# Altium PCB MB1367.PcbDoc (part 2 of 6)
Units mm, origin at the board's own origin, x right, y up, seen from the top; angles counter-clockwise.
Board outline 70 x 82.5 mm, 4 copper layers (Top Layer, Signal Layer 1, Signal Layer 2, Bottom Layer), stack 1.614 mm thick; 187 components, 143 nets, 802 pads, 920 vias.
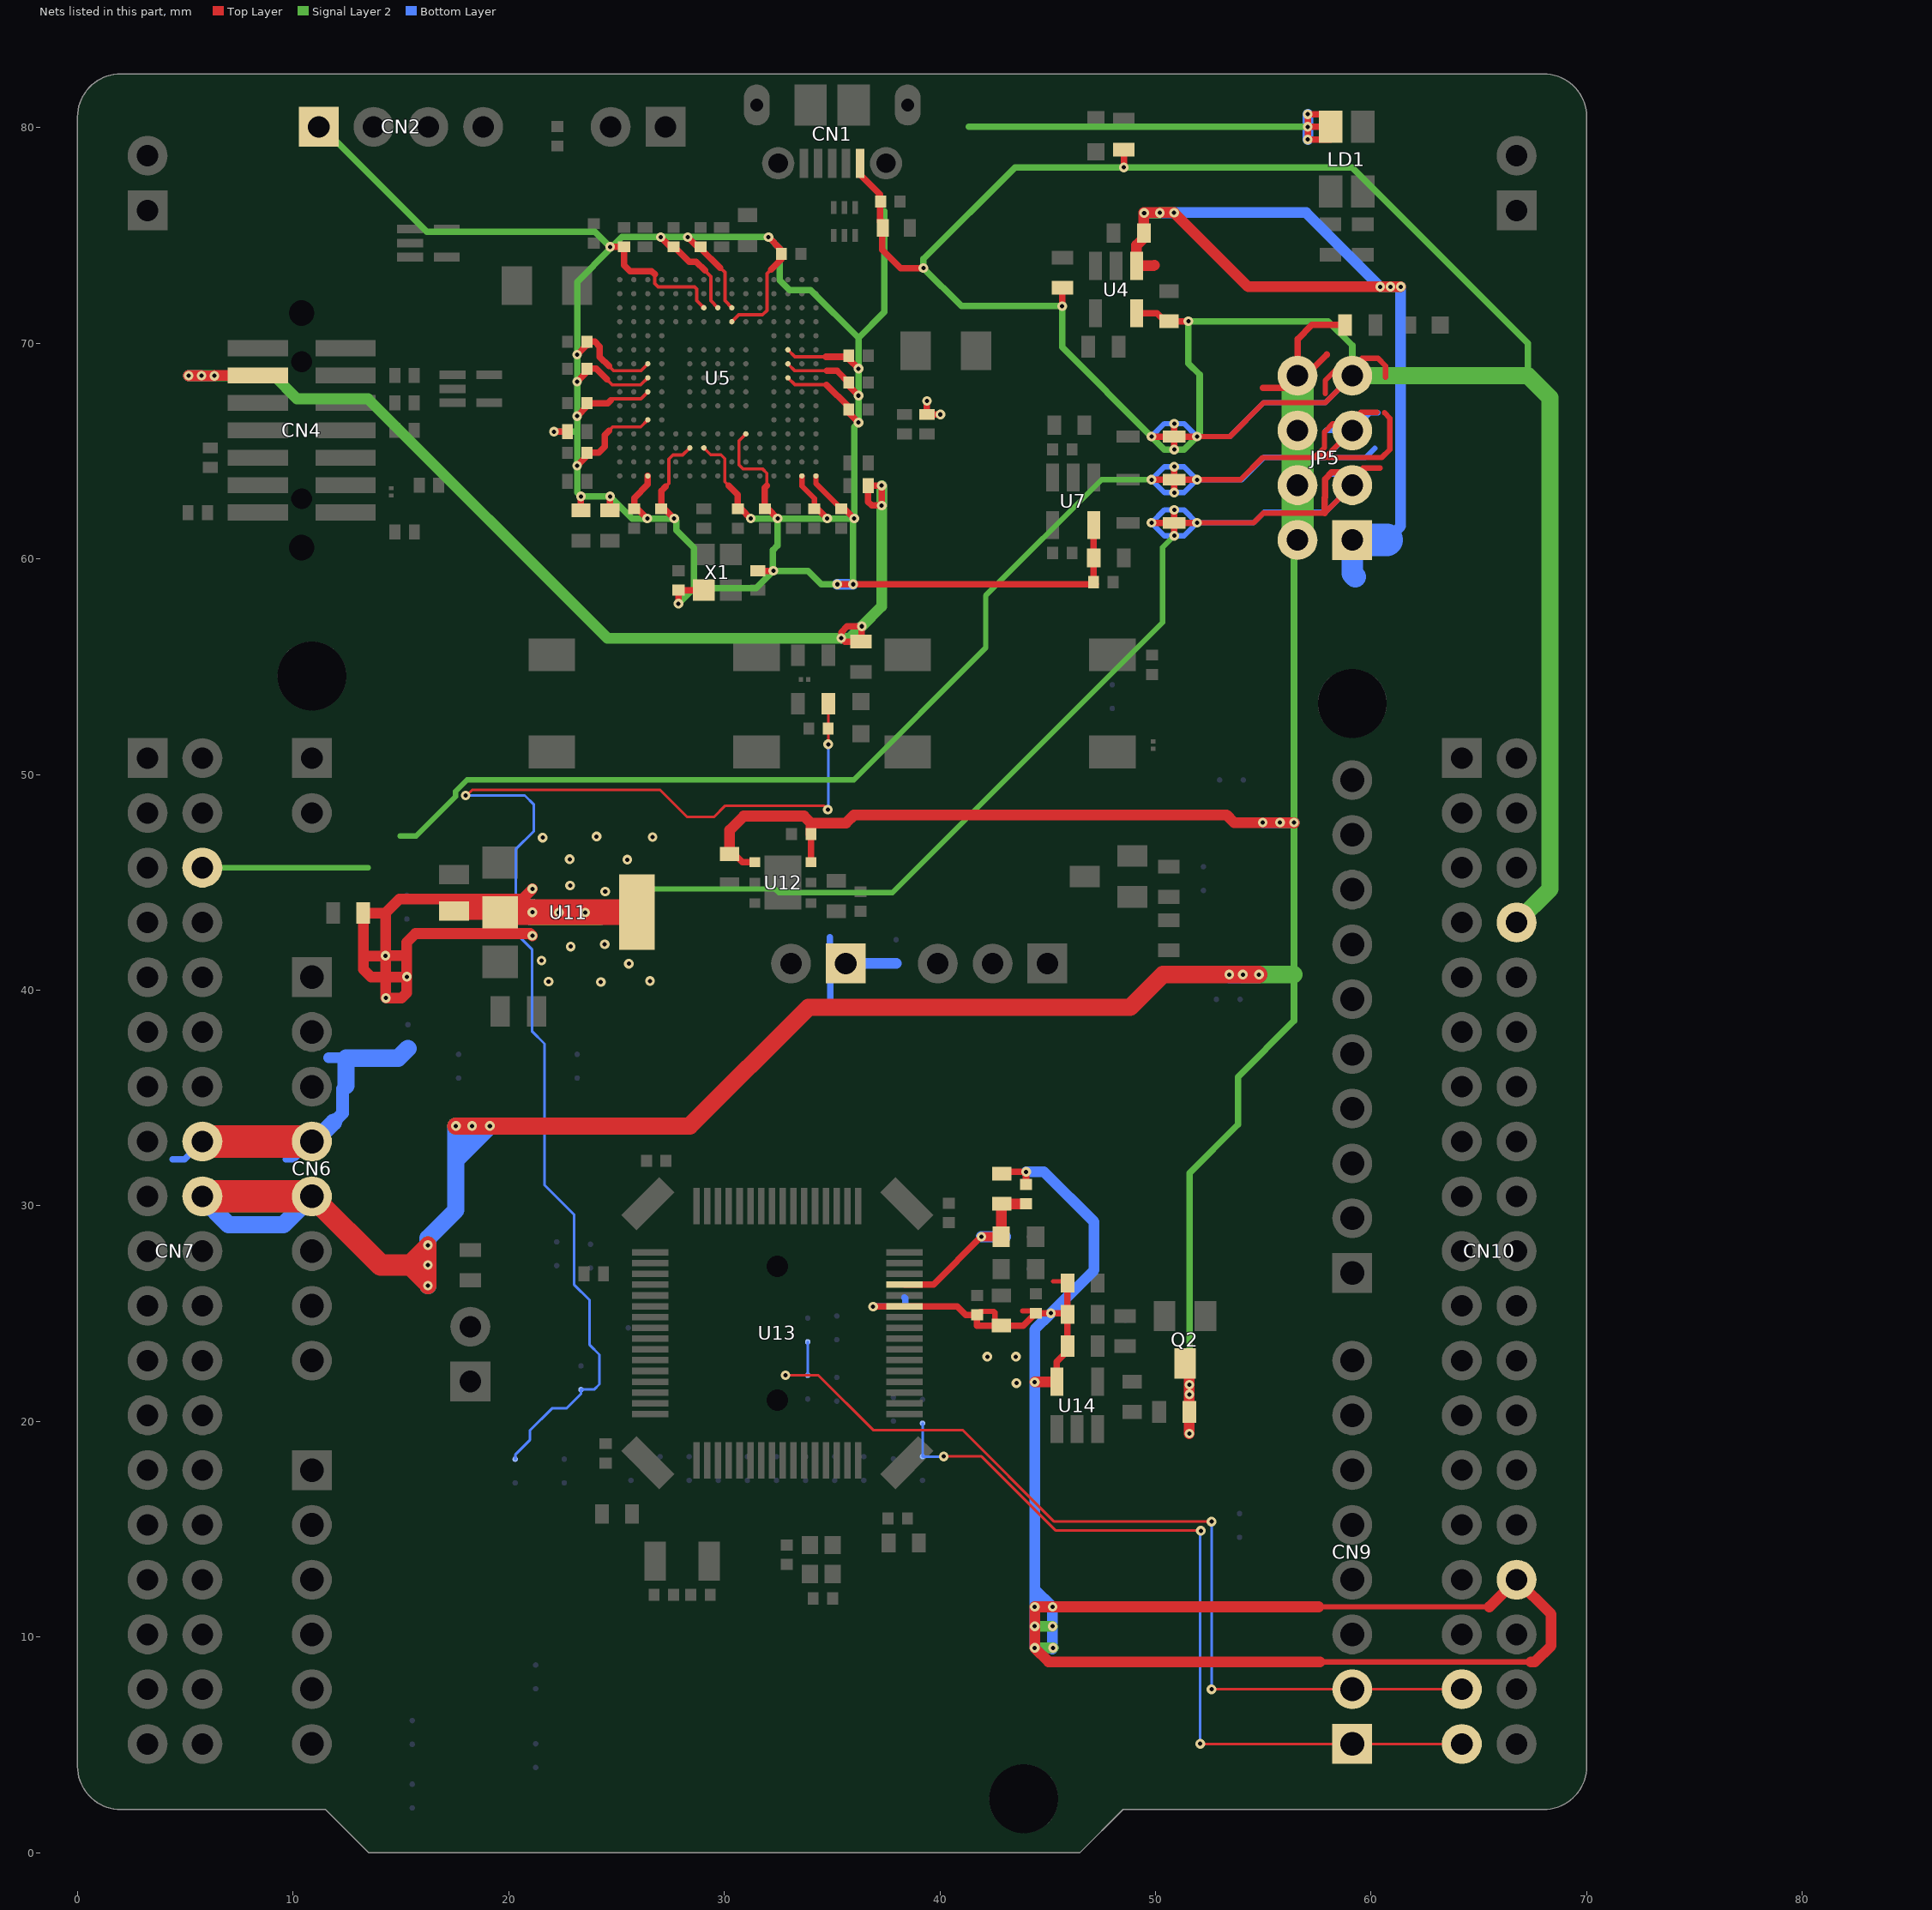
[diagram p4: the nets of this part, all layers, seen from the top]

## Part data
B1: library part MCD-00002, "Non-Open Push-Button 0.1A 24V", Manufacturer=WEALTHMETAL, Manufacturer_HQ_COO=Unknown, Manufacturer_Part_Number=TD-0341X-GO0, Package=6x10mm, Alternate_EMS=A, Component_Country_Of_Origin=Unknown, ComponentLink1Description=Datasheet, ComponentLink1URL=http://tunmcdsvn.tun.st.com/Component_Documentation_Library/Trunk/Misc/WEALTHMETAL_TD-0341, ECCN_EU=n/a, ECCN_US=n/a, ID=2464, Internal_Part_Number=MCD-00002, Order_Code_Digikey=N/A, Order_Code_Farnell=N/A, Order_Code_RS=N/A, Part_Preference=Forbidden, Part_Type=Misc, Partial_Alternate_Internal_Part_Number=MCD-03589, Provided_By=SUBCO, ShowFields=YES, Status=Obsolete
B2: library part MCD-00001, "Non-Open Push-Button 0.1A 24V BLACK", Manufacturer=WEALTHMETAL, Manufacturer_Part_Number=TD-0341X-A00, Package=6x10mm, Alternate_EMS=A, Component_Country_Of_Origin=Unknown, ComponentLink1Description=Datasheet, ComponentLink1URL=http://tunmcdsvn.tun.st.com/Component_Documentation_Library/Trunk/Misc/WEALTHMETAL_TD-0341, ECCN_EU=n/a, ECCN_US=n/a, ID=2463, Internal_Part_Number=MCD-00001, Order_Code_Digikey=N/A, Order_Code_Farnell=N/A, Order_Code_RS=N/A, Part_Preference=Forbidden, Part_Type=Misc, Partial_Alternate_Internal_Part_Number=MCD-03587, Provided_By=SUBCO, ShowFields=YES, Status=Obsolete
C1 C6 C7 C8 C9 C13 C14 C15 C16 C17 C18 C20 C21 C22 C23 C24 C25 C26 C27 C32 C33 C34 C35 C36 C40 C42 C44 C45 C47 C49 C52 C54: library part MCD-00006, "Capacitor, MLCC, 100nF, 16V, X7R, +/-10%, 0402, T=0.5mm", Manufacturer=YAGEO, Manufacturer_Part_Number=CC0402KRX7R7BB104, Package=0402, Component_Country_Of_Origin=China, ComponentLink1URL=http://tunmcdsvn.tun.st.com/Component_Documentation_Library/Trunk/Capacitor/YAGEO_X7R_Series, ID=2474, Internal_Part_Number=MCD-00006, Order_Code_Digikey=311-1338-1-ND, Order_Code_Farnell=9402047, Order_Code_RS=9402047, Part_Preference=Recommended, Part_Type=Capacitor, Partial_Alternate_Internal_Part_Number=MCD-03299, ShowFields=YES, Status=Released
C2: library part MCD-00205, "Capacitor, MLCC, 100pF, 50V, NPO, 5%, 0402, T=0,5mm", Manufacturer=YAGEO, Manufacturer_Part_Number=CC0402JRNPO9BN101, Package=0402, Component_Country_Of_Origin=China, ComponentLink1Description=Yageo_Capacitor_NP0_16V-to-50V.pdf, ComponentLink1URL=http://tunmcdsvn.tun.st.com/Component_Documentation_Library/Trunk/Capacitor/YAGEO_NP0_Series, ID=2658, Internal_Part_Number=MCD-00205, Order_Code_Digikey=311-1024-1-ND, Order_Code_Farnell=3019226RL, Order_Code_RS=N/A, Part_Preference=Recommended, Part_Type=Capacitor, Provided_By=Subcon, ShowFields=YES, Status=Released
C3: library part MCD-00016, "Capacitor, MLCC, 20pF, 50V, NPO, 5%, 0402, T=0,5mm", Manufacturer=YAGEO, Manufacturer_Part_Number=CC0402JRNPO9BN200, Package=0402, Component_Country_Of_Origin=China, ComponentLink1Description=Yageo_Capacitor_NP0_16V-to-50V.pdf, ComponentLink1URL=http://tunmcdsvn.tun.st.com/Component_Documentation_Library/Trunk/Capacitor/YAGEO_NP0_Series, ECCN_EU=n/a, ECCN_US=n/a, ID=2479, Initial_Board_Reference=MB1274, Internal_Part_Number=MCD-00016, Order_Code_Digikey=311-1417-1-ND, Order_Code_Farnell=N/A, Order_Code_RS=N/A, Part_Preference=Recommended, Part_Type=Capacitor, Provided_By=Subcon, ShowFields=YES, Status=Released
C4: library part MCD-00012, "Capacitor, MLCC, 2.2uF, 10V, X5R, 10%, 0603, T=0,8mm", Alternate_Manufacturer=KEMET, Alternate_Manufacturer_Part_Number=C0603C225K8PACTU, Manufacturer=YAGEO, Manufacturer_Part_Number=CC0603KRX5R6BB225, Package=0603, BMS_Part_Number=9142010, Component_Country_Of_Origin=China, ComponentLink1Description=Yageo_Capacitor_X5R-series.pdf, ComponentLink1URL=http://tunmcdsvn.tun.st.com/Component_Documentation_Library/Trunk/Capacitor/YAGEO_X5R_Series, ECCN_EU=n/a, ECCN_US=n/a, ID=2467, Initial_Board_Reference=MB1274, Internal_Part_Number=MCD-00012, Order_Code_Digikey=311-1451-1-ND, Order_Code_Farnell=2370679, Order_Code_RS=2370679, Part_Preference=Recommended, Part_Type=Capacitor, Partial_Alternate_Internal_Part_Number=MCD-00551, Provided_By=Subcon, ShowFields=YES, Status=Released
C5 C11 C19 C29 C31 C37 C39 C43 C48 C53: library part MCD-00010, "Capacitor, MLCC, 1uF, 16V, X5R, 10%, 0603, T=0,8mm", Manufacturer=YAGEO, Manufacturer_Part_Number=CC0603KRX5R7BB105, Package=0603, Component_Country_Of_Origin=China, ComponentLink1Description=Yageo_Capacitor_X5R-series.pdf, ComponentLink1URL=http://tunmcdsvn.tun.st.com/Component_Documentation_Library/Trunk/Capacitor/YAGEO_X5R_Series, ECCN_EU=n/a, ECCN_US=n/a, ID=2470, Initial_Board_Reference=MB1274, Internal_Part_Number=MCD-00010, Order_Code_Digikey=311-1444-1-ND, Order_Code_Farnell=2370680, Order_Code_RS=2370680, Part_Preference=Recommended, Part_Type=Capacitor, Provided_By=Subcon, ShowFields=YES, Status=Released
C10 C12: library part MCD-00008, "Capacitor, MLCC, 2.2uF, 16V, X7R, 10%, 1206, T=1,15mm", Alternate_Manufacturer=KEMET, Alternate_Manufacturer_Part_Number=C1206C225K4RAC, Manufacturer=YAGEO, Manufacturer_Part_Number=CC1206KKX7R7BB225, Package=1206, Component_Country_Of_Origin=China, ComponentLink1Description=Yageo_Capacitor_X7R-series.pdf, ComponentLink1URL=http://tunmcdsvn.tun.st.com/Component_Documentation_Library/Trunk/Capacitor/YAGEO_X7R_Series, ECCN_EU=n/a, ECCN_US=n/a, ID=2472, Initial_Board_Reference=MB1274, Internal_Part_Number=MCD-00008, Order_Code_Digikey=311-1957-1-ND, Order_Code_Farnell=N/A, Order_Code_RS=N/A, Part_Preference=Recommended, Part_Type=Capacitor, Provided_By=Subcon, ShowFields=YES, Status=Released
C28 C55: library part MCD-00009, "Capacitor, MLCC, 4.7uF, 16V, X5R, 10%, 0603, T=0.8mm", Manufacturer=YAGEO, Manufacturer_Part_Number=CC0603KRX5R7BB475, Package=0603, Alternate_EMS=A, Component_Country_Of_Origin=China, ComponentLink1Description=Yageo_Capacitor_X5R-series.pdf, ComponentLink1URL=http://tunmcdsvn.tun.st.com/Component_Documentation_Library/Trunk/Capacitor/YAGEO_X5R_Series, ECCN_EU=n/a, ECCN_US=n/a, ID=2471, Initial_Board_Reference=MB1274, Internal_Part_Number=MCD-00009, Order_Code_Digikey=311-1785-1-ND, Order_Code_Farnell=N/A, Order_Code_RS=N/A, Part_Preference=Recommended, Part_Type=Capacitor, Partial_Alternate_Internal_Part_Number=MCD-03565, Provided_By=subcon, ShowFields=YES, Status=Released
C30: library part MCD-00011, "Capacitor, MLCC, 10nF, 16V, X7R, 10%, 0402, T=0.5mm", Manufacturer=YAGEO, Manufacturer_Part_Number=CC0402KRX7R7BB103, Package=0402, Component_Country_Of_Origin=China, ComponentLink1Description=Yageo_Capacitor_X7R-series.pdf, ComponentLink1URL=http://tunmcdsvn.tun.st.com/Component_Documentation_Library/Trunk/Capacitor/YAGEO_X7R_Series, ECCN_EU=n/a, ECCN_US=n/a, ID=2469, Initial_Board_Reference=MB1274, Internal_Part_Number=MCD-00011, Order_Code_Digikey=311-1042-1-ND, Order_Code_Farnell=3019275, Order_Code_RS=3019275, Part_Preference=Recommended, Part_Type=Capacitor, Provided_By=Subcon, ShowFields=YES, Status=Released
C38 C41: library part MCD-00014, "Capacitor, MLCC, 10uF, 25V, X5R, 10%, 0805, T=0,85mm", Manufacturer=YAGEO, Manufacturer_Part_Number=CC0805KRX5R8BB106, Package=0805, Component_Country_Of_Origin=China, ComponentLink1Description=Datasheet, ComponentLink1URL=http://tunmcdsvn.tun.st.com/Component_Documentation_Library/Trunk/Capacitor/YAGEO_X5R_Series, ECCN_EU=NEC, ECCN_US=EAR99, Full_Alternate_Internal_Part_Number=MCD-02385, ID=2468, Internal_Part_Number=MCD-00014, Order_Code_Digikey=311-3503-1-ND, Order_Code_Farnell=N/A, Order_Code_RS=N/A, Part_Preference=Recommended, Part_Type=Capacitor, Partial_Alternate_Internal_Part_Number=MCD-03053, Provided_By=SUBCO, ShowFields=YES, Status=Released
C46: library part MCD-01124, "Capacitor, MLCC, 10uF, 10V, X5R, 10%, 0603, T=0.8mm", Manufacturer=MURATA, Manufacturer_Part_Number=GRM188R61A106KAAL, Package=0603, Component_Country_Of_Origin=Japan°°, ComponentLink1Description=Datasheet, ComponentLink1URL=http://tunmcdsvn.tun.st.com/Component_Documentation_Library/Trunk/Capacitor/MURATA_GRM_Series, ECCN_EU=NEC, ECCN_US=EAR99, ID=3372, Internal_Part_Number=MCD-01124, Order_Code_Digikey=490-12733-1-ND, Order_Code_Farnell=N/A, Order_Code_RS=170-6258, Part_Preference=Recommended, Part_Type=Capacitor, Partial_Alternate_Internal_Part_Number=MCD-03152, Provided_By=SUBCO, ShowFields=YES, Status=Released
C50: library part MCD-00211, "Capacitor, MLCC, 100nF, 16V, X7R, 10%, 0603, T=0,8mm", Manufacturer=YAGEO, Manufacturer_Part_Number=CC0603KRX7R7BB104, Package=0603, Component_Country_Of_Origin=China, ComponentLink1Description=Datasheet, ComponentLink1URL=http://tunmcdsvn.tun.st.com/Component_Documentation_Library/Trunk/Capacitor/YAGEO_X7R_Series, ECCN_EU=NEC, ECCN_US=EAR99, ID=2659, Internal_Part_Number=MCD-00211, Order_Code_Digikey=311-1088-1-ND, Order_Code_Farnell=432210, Order_Code_RS=669-8763, Part_Preference=Recommended, Part_Type=Capacitor, Partial_Alternate_Internal_Part_Number=MCD-01099, Provided_By=SUBCO, ShowFields=YES, Status=Released
C51: library part MCD-01101, "Capacitor,100pF,50V,X7R,10%,0603", Alternate_Manufacturer=N/A, Manufacturer="KYOCERA AVX", Manufacturer_Part_Number=06035C101JAT4A, Package=0603, Alternate_Manufacturer_Part_Number=N/A, Component_Country_Of_Origin=China, ComponentLink1Description=Datasheet, ComponentLink1URL=http://tunmcdsvn.tun.st.com/Component_Documentation_Library/Trunk/Capacitor/AVX_X7R_Series, ECCN_EU=NEC, ECCN_US=EAR99, ID=3399, Internal_Part_Number=MCD-01101, Order_Code_Digikey=06035C101JAT4A-ND, Order_Code_Farnell=2332634, Order_Code_RS=N/A, Part_Preference=Recommended, Part_Type=Capacitor, Provided_By=SUBCO, ShowFields=YES, Status=Checked
C56 C59: library part MCD-00674, "Capacitor, MLCC, 6.8pF, 50V, NPO, +-0.25pF, 0402, T=0.5mm", Manufacturer=YAGEO, Manufacturer_Part_Number=CC0402CRNPO9BN6R8, Package=0402, Component_Country_Of_Origin=China, ComponentLink1Description=Datasheet, ComponentLink1URL=http://tunmcdsvn.tun.st.com/Component_Documentation_Library/Trunk/Capacitor/YAGEO_NP0_Series, ECCN_EU=N/A, ECCN_US=N/A, ID=3068, Internal_Part_Number=MCD-00674, Order_Code_Digikey=311-3327-1-ND, Order_Code_Farnell=N/A, Order_Code_RS=N/A, Part_Preference=Recommended, Part_Type=Capacitor, Provided_By=SUBCO, ShowFields=YES, Status=Released
C57 C58: library part MCD-00003, "Capacitor, MLCC, 5.1pF, 50V, NPO, +-0.25pF, 0402, T=0.5mm", Manufacturer=YAGEO, Manufacturer_Part_Number=CC0402CRNPO9BN5R1, Package=0402, Component_Country_Of_Origin=China, ComponentLink1Description=Datasheet, ComponentLink1URL=http://tunmcdsvn.tun.st.com/Component_Documentation_Library/Trunk/Capacitor/YAGEO_NP0_Series, ECCN_EU=NEC, ECCN_US=EAR99, ID=2477, Internal_Part_Number=MCD-00003, Order_Code_Digikey=311-1633-1-ND, Order_Code_Farnell=N/A, Order_Code_RS=N/A, Part_Preference=Recommended, Part_Type=Capacitor, Provided_By=SUBCO, ShowFields=YES, Status=Released
CN1: library part MCD-00028, "USB-MICRO-B, 0.65mm, RA, SMT, Bottom Mount,", Manufacturer=MOLEX, Manufacturer_Part_Number=1050170001, Component_Country_Of_Origin=Unknown, ComponentLink1Description=Molex_Connector-USB-microB_105017-0001.pdf, ComponentLink1URL=http://tunmcdsvn.tun.st.com/Component_Documentation_Library/Trunk/Connector/MOLEX_1050170001, ECCN_EU=n/a, ECCN_US=n/a, ID=2489, Initial_Board_Reference=MB1274, Internal_Part_Number=MCD-00028, Order_Code_Digikey=WM1399TR-ND, Order_Code_Farnell=2293836, Order_Code_RS=2293836, Part_Preference=Recommended, Part_Type=Connector, Partial_Alternate_Internal_Part_Number=MCD-04277, Provided_By=Subcon, ShowFields=YES, Status=Released
CN2: library part MCD-00029, "Header, 4x1, 2,54mm, VR, TH, Height 5.84mm/2.54mm", Manufacturer=SAMTEC, Manufacturer_Part_Number=TSW-104-07-G-S, Component_Country_Of_Origin="United States°", ComponentLink1Description=Samtec_connector_TSW-HTSW-series.pdf, ComponentLink1URL=http://tunmcdsvn.tun.st.com/Component_Documentation_Library/Trunk/Connector/SAMTEC_TSW_Series, ECCN_EU=n/a, ECCN_US=n/a, ID=2487, Initial_Board_Reference=MB1274, Internal_Part_Number=MCD-00029, Order_Code_Digikey=TSW-104-07-G-S-ND, Order_Code_Farnell=2667450, Order_Code_RS=161-2460, Part_Preference=Recommended, Part_Type=Connector, Partial_Alternate_Internal_Part_Number=MCD-04227, Provided_By=Subcon, ShowFields=YES, Status=Released
CN4: library part MCD-01226, "Header 5x2, 1.27mm, Dual row, Straight, Surface mount, vertical male connector. 3.05mm lead. Mates with FFSD connector. Footprint compatible with FTSH-107-01-L-DV,-K,-A,-P,-ES (STDC14 MEDIUM)", Alternate_Manufacturer=JIUBABA, Alternate_Manufacturer_Part_Number=P127B-2x05MGF-079-0A, Manufacturer=SAMTEC, Manufacturer_Part_Number=FTSH-105-01-L-DV-K, Component_Country_Of_Origin="China, Costa Rica, Malaysia, USA, Vietnam", ComponentLink1Description=Datasheet, ComponentLink1URL=http://tunmcdsvn.tun.st.com/Component_Documentation_Library/Trunk/Connector/SAMTEC_FTSH_Series, ECCN_EU=n/a, ECCN_US=n/a, ID=3265, Internal_Part_Number=MCD-01226, Order_Code_Digikey=SAM8799-ND, Order_Code_Farnell=2856879, Order_Code_RS=159-2332, Part_Preference=Recommended, Part_Type=Connector, Partial_Alternate_Internal_Part_Number="MCD-02956, MCD-03742, MCD-03788, MCD-03996, MCD-04591", Provided_By=SUBCO, ShowFields=YES, Status=Released
CN5: library part MCD-00262, "Socket, 10x1, 2.54mm, VR, TH, Height 8.51mm/10mm", Manufacturer=SAMTEC, Manufacturer_Part_Number=SSW-110-03-G-S, Component_Country_Of_Origin="China, Costa Rica, Malaysia, USA, Vietnam", ComponentLink1Description=Datasheet, ComponentLink1URL=http://tunmcdsvn.tun.st.com/Component_Documentation_Library/Trunk/Connector/SAMTEC_SSW-SSQ(TH)_Series/, ECCN_EU=n/a, ECCN_US=n/a, Full_Alternate_Internal_Part_Number=MCD-02397, ID=2609, Internal_Part_Number=MCD-00262, Order_Code_Digikey=SSW-110-03-G-S-ND, Order_Code_Farnell=3661270, Order_Code_RS=207-9189, Part_Preference=Recommended, Part_Type=Connector, Provided_By=SUBCO, ShowFields=YES, Status=Released
CN6 CN9: library part MCD-00261, "Socket, 8x1, 2.54mm, VR, TH, Height 8.51mm/10mm", Manufacturer=SAMTEC, Manufacturer_Part_Number=SSW-108-03-G-S, Component_Country_Of_Origin="China, Costa Rica, Malaysia, USA, Vietnam", ComponentLink1Description=Datasheet, ComponentLink1URL=http://tunmcdsvn.tun.st.com/Component_Documentation_Library/Trunk/Connector/SAMTEC_SSW-SSQ(TH)_Series/, ECCN_EU=n/a, ECCN_US=n/a, ID=2607, Internal_Part_Number=MCD-00261, Order_Code_Digikey=SSW-108-03-G-S-ND, Order_Code_Farnell=N/A, Order_Code_RS=N/A, Part_Preference=Recommended, Part_Type=Connector, Partial_Alternate_Internal_Part_Number=MCD-02396, Provided_By=SUBCO, ShowFields=YES, Status=Released
CN7 CN10: library part MCD-00213, "Header, 19x2, 2,54mm, VR, TH, Height 5.84mm/10.16mm", Manufacturer=SAMTEC, Manufacturer_Part_Number=TSW-119-09-G-D, Component_Country_Of_Origin="China, Costa Rica, Malaysia, USA, Vietnam", ComponentLink1Description=Datasheet, ComponentLink1URL=http://tunmcdsvn.tun.st.com/Component_Documentation_Library/Trunk/Connector/SAMTEC_TSW_Series, ECCN_EU=n/a, ECCN_US=n/a, ID=2656, Internal_Part_Number=MCD-00213, Order_Code_Digikey=TSW-119-09-G-D-ND, Order_Code_Farnell=3664236, Order_Code_RS=N/A, Part_Preference=Recommended, Part_Type=Connector, Partial_Alternate_Internal_Part_Number="MCD-00213, MCD-02394, MCD-03736, MCD-03787, MCD-03997, MCD-04171, MCD-04274", Provided_By=SUBCO, ShowFields=YES, Status=Released
CN8: library part MCD-00260, "Socket, 6x1, 2.54mm, VR, TH, Height 8.51mm/10mm", Manufacturer=SAMTEC, Manufacturer_Part_Number=SSW-106-03-G-S, Component_Country_Of_Origin="China, Costa Rica, Malaysia, USA, Vietnam", ComponentLink1Description=Datasheet, ComponentLink1URL=http://tunmcdsvn.tun.st.com/Component_Documentation_Library/Trunk/Connector/SAMTEC_SSW-SSQ(TH)_Series/, ECCN_EU=n/a, ECCN_US=n/a, ID=2606, Internal_Part_Number=MCD-00260, Order_Code_Digikey=SSW-106-03-G-S-ND, Order_Code_Farnell=N/A, Order_Code_RS=N/A, Part_Preference=Recommended, Part_Type=Connector, Partial_Alternate_Internal_Part_Number=MCD-02395, Provided_By=SUBCO, ShowFields=YES, Status=Released
CN11 CN12: library part MCD-00214, "Header, 2x1, 2,54mm, VR, TH, Height 5.84mm/10.16mm", Manufacturer=SAMTEC, Manufacturer_Part_Number=TSW-102-09-G-S, Component_Country_Of_Origin="China, Costa Rica, Malaysia, USA, Vietnam", ComponentLink1Description=Samtec_connector_TSW-HTSW-series.pdf, ComponentLink1URL=http://tunmcdsvn.tun.st.com/Component_Documentation_Library/Trunk/Connector/SAMTEC_TSW_Series/, ECCN_EU=n/a, ECCN_US=n/a, ID=2652, Initial_Board_Reference=MB1319, Internal_Part_Number=MCD-00214, Order_Code_Digikey=SAM10845-ND, Order_Code_Farnell=3663349, Order_Code_RS=180-3129, Part_Preference=Recommended, Part_Type=Connector, Partial_Alternate_Internal_Part_Number="MCD-02393, MCD-03591, MCD-03719, MCD-03986, MCD-03999, MCD-04227", Provided_By=Subcon, ShowFields=YES, Status=Released
D1 D2 D3: library part MCD-00034, "BAT60JFILM", Manufacturer=STMICROELECTRONICS, Manufacturer_HQ_COO=EU, Package=SOD-323, BMS_Part_Number=9151097, Component_Country_Of_Origin=China, ComponentLink1Description=STM_Diode_BAT60JFILM-SOD323.pdf, ComponentLink1URL=http://tunmcdsvn.tun.st.com/Component_Documentation_Library/Trunk/Diode/STMICROELECTRONICS_BAT60J_Series, ECCN_EU=NEC, ECCN_US=EAR99, ID=2483, Initial_Board_Reference=MB1274, Internal_Part_Number=MCD-00034, Manufacturer_Part_Number=BAT60JFILM, Order_Code_Digikey=497-3707-2-ND, Order_Code_Farnell=1467544, Order_Code_RS=714-6879, Part_Preference=Recommended, Part_Type=Diode, Provided_By=Subcon, ShowFields=YES, Status=Released
HW103: library part MCD-00636, "NUCLEO logo footprint for PCB", Manufacturer=N/A, Manufacturer_HQ_COO=Unknown, Component_Country_Of_Origin=Unknown, ComponentLink1Description=Datasheet, ECCN_EU=n/a, ECCN_US=n/a, ID=3110, Internal_Part_Number=MCD-00636, Manufacturer_Part_Number=N/A, Order_Code_Digikey=N/A, Order_Code_Farnell=N/A, Order_Code_RS=N/A, Part_Preference=Forbidden, Part_Type=Accessory, Provided_By=n/a, ShowFields=YES, Status=Obsolete
HW104: library part MCD-00626, "CE logo footprint for PCB", Manufacturer=N/A, Manufacturer_HQ_COO=Unknown, Component_Country_Of_Origin=Unknown, ComponentLink1Description=Datasheet, ComponentLink1URL=http://tunmcdsvn.tun.st.com/Component_Documentation_Library/Trunk, ECCN_EU=n/a, ECCN_US=n/a, ID=3116, Internal_Part_Number=MCD-00626, Manufacturer_Part_Number=N/A, Order_Code_Digikey=N/A, Order_Code_Farnell=N/A, Order_Code_RS=N/A, Part_Preference=Forbidden, Part_Type=Misc, Provided_By=n/a, ShowFields=YES, Status=Obsolete
HW105: library part MCD-00628, "ROHS logo footprint for PCB", Manufacturer=N/A, Manufacturer_HQ_COO=Unknown, Component_Country_Of_Origin=Unknown, ComponentLink1Description=Datasheet, ComponentLink1URL=http://tunmcdsvn.tun.st.com/Component_Documentation_Library/Trunk, ECCN_EU=n/a, ECCN_US=n/a, ID=3120, Internal_Part_Number=MCD-00628, Manufacturer_Part_Number=N/A, Order_Code_Digikey=N/A, Order_Code_Farnell=N/A, Order_Code_RS=N/A, Part_Preference=Forbidden, Part_Type=Misc, Provided_By=n/a, ShowFields=YES, Status=Obsolete
HW106: library part MCD-00625, "STMicroelectronics logo footprint for PCB", Manufacturer=N/A, Manufacturer_HQ_COO=Unknown, Component_Country_Of_Origin=Unknown, ComponentLink1Description=Datasheet, ComponentLink1URL=http://tunmcdsvn.tun.st.com/Component_Documentation_Library/Trunk/Misc, ECCN_EU=n/a, ECCN_US=n/a, ID=3117, Internal_Part_Number=MCD-00625, Manufacturer_Part_Number=N/A, Order_Code_Digikey=N/A, Order_Code_Farnell=N/A, Order_Code_RS=N/A, Part_Preference=Forbidden, Part_Type=Misc, Provided_By=n/a, ShowFields=YES, Status=Obsolete
HW107: library part MCD-00627, "Hand ESD logo footprint for PCB", Manufacturer=N/A, Manufacturer_HQ_COO=Unknown, Component_Country_Of_Origin=Unknown, ComponentLink1Description=Datasheet, ComponentLink1URL=http://tunmcdsvn.tun.st.com/Component_Documentation_Library/Trunk/Misc, ECCN_EU=n/a, ECCN_US=n/a, ID=3114, Internal_Part_Number=MCD-00627, Manufacturer_Part_Number=N/A, Order_Code_Digikey=N/A, Order_Code_Farnell=N/A, Order_Code_RS=N/A, Part_Preference=Forbidden, Part_Type=Misc, Provided_By=n/a, ShowFields=YES, Status=Obsolete
JP1 JP7: library part MCD-00045, "Header, 2x1, 2,54mm, VR, TH, Height 5.84mm/2.54mm", Manufacturer=SAMTEC, Manufacturer_Part_Number=TSW-102-07-G-S, Component_Country_Of_Origin="China, Costa Rica, Malaysia, USA, Vietnam", ComponentLink1Description=Samtec_connector_TSW-HTSW-series.pdf, ComponentLink1URL=http://tunmcdsvn.tun.st.com/Component_Documentation_Library/Trunk/Connector/SAMTEC_TSW_Series, ECCN_EU=n/a, ECCN_US=n/a, ID=2545, Initial_Board_Reference=MB1274, Internal_Part_Number=MCD-00045, Order_Code_Digikey=SAM1029-02-ND, Order_Code_Farnell=2505044, Order_Code_RS=2505044, Part_Preference=Recommended, Part_Type=Connector, Partial_Alternate_Internal_Part_Number="MCD-02389, MCD-02957, MCD-03720, MCD-03979, MCD-04249", Provided_By=Subcon, ShowFields=YES, Status=Released
JP3 JP6: library part MCD-00683, "Header, 2x1, 2,54mm, VR, TH, Height 5.84mm/2.54mm - Shunt Fitted by default", Manufacturer=SAMTEC, Manufacturer_Part_Number=TSW-102-07-G-S, Component_Country_Of_Origin="China, Costa Rica, Malaysia, USA, Vietnam", ComponentLink1Description=Samtec_connector_TSW-HTSW-series.pdf, ComponentLink1URL=http://tunmcdsvn.tun.st.com/Component_Documentation_Library/Trunk/Connector/SAMTEC_TSW_Series, ECCN_EU=n/a, ECCN_US=n/a, ID=3057, Initial_Board_Reference=MB1331, Internal_Part_Number=MCD-00683, Order_Code_Digikey=SAM1029-02-ND, Order_Code_Farnell=2505044, Order_Code_RS=155-5312, Part_Preference=Recommended, Part_Type=Connector, Partial_Alternate_Internal_Part_Number="MCD-02389, MCD-02957, MCD-03720, MCD-03979, MCD-04463", Provided_By=Subcon, ShowFields=YES, Status=Released
JP5: library part MCD-00686, "Header, 4x2, 2,54mm, VR, TH, Height 5.84mm/2.54mm - Shunt Fitted 1-2", Manufacturer=SAMTEC, Manufacturer_Part_Number=TSW-104-07-G-D, Component_Country_Of_Origin="China, Costa Rica, Malaysia, USA, Vietnam", ComponentLink1Description=Datasheet, ComponentLink1URL=http://tunmcdsvn.tun.st.com/Component_Documentation_Library/Trunk/Connector/SAMTEC_TSW_Series, ECCN_EU=n/a, ECCN_US=n/a, ID=3062, Internal_Part_Number=MCD-00686, Order_Code_Digikey=SAM1028-04-ND, Order_Code_Farnell=2856692, Order_Code_RS=161-2260, Part_Preference=Recommended, Part_Type=Connector, Partial_Alternate_Internal_Part_Number="MCD-01661, MCD-03721, MCD-03993", Provided_By=SUBCO, ShowFields=YES, Status=Released
JP8: library part MCD-00684, "Header, 3x1, 2,54mm, VR, TH, Height 5.84mm/2.54mm - Shunt Fitted 1-2 by default", Manufacturer=SAMTEC, Manufacturer_Part_Number=TSW-103-07-F-S, Component_Country_Of_Origin="China, Costa Rica, Malaysia, USA, Vietnam", ComponentLink1Description=Datasheet, ComponentLink1URL=http://tunmcdsvn.tun.st.com/Component_Documentation_Library/Trunk/Connector/SAMTEC_TSW_Series/, ECCN_EU=n/a, ECCN_US=n/a, ID=3059, Internal_Part_Number=MCD-00684, Order_Code_Digikey=SAM8995-ND, Order_Code_Farnell=2505043, Order_Code_RS=161-2248, Part_Preference=Recommended, Part_Type=Connector, Partial_Alternate_Internal_Part_Number="MCD-03595, MCD-03723, MCD-03849, MCD-03980, MCD-04583", Provided_By=SUBCO, ShowFields=YES, Status=Released
L1 L2: library part MCD-00047, "SMD Chip ferrite bead, 600R@100MHz +/-25%, 350mA, 500mohm DC, 0603, T=0.8mm", Manufacturer=TAI-TECH, Manufacturer_Part_Number=FCM1608KF-601T03, Package=0603, Component_Country_Of_Origin=Unknown, ComponentLink1Description=Datasheet, ComponentLink1URL=http://tunmcdsvn.tun.st.com/Component_Documentation_Library/Trunk/Inductor/TAI-TECH_FCM-1608_Series, ECCN_EU=n/a, ECCN_US=n/a, ID=2546, Internal_Part_Number=MCD-00047, Order_Code_Digikey=N/A, Order_Code_Farnell=N/A, Order_Code_RS=N/A, Part_Preference=Recommended, Part_Type=Inductor, Partial_Alternate_Internal_Part_Number=MCD-02959, Provided_By=SUBCO, ShowFields=YES, Status=Released
LD1: library part MCD-02402, "LED Bicolor", Manufacturer=EVERLIGHT, Manufacturer_Part_Number=67-22SURSYGC/S530-A2/TR8, Package=4-PLCC, Alternate_Internal_Part_Number=MCD-00051, ComponentLink1URL=http://tunmcdsvn.tun.st.com/Component_Documentation_Library/Trunk/Display/EVERLIGHT_67-22sursygc-s530-a2-tr8, Full_Alternate_Internal_Part_Number="MCD-00051, MCD-02631", ID=4508, Internal_Part_Number=MCD-02402, Order_Code_Digikey=1080-67-22SURSYGC/S530-A2/TR8TR-ND, Order_Code_Farnell=N/A, Order_Code_RS=N/A, Part_Preference="Not recommended", Part_Type=Display, ShowFields=YES, Status=Released
LD2 LD3: library part MCD-02900, "LED, Green, 2V, 20mA, 0603", Manufacturer=EVERLIGHT, Manufacturer_Part_Number=19-213SYGC/S530-E2/5T, Package=0603, Component_Country_Of_Origin=China, ComponentLink1URL=http://tunmcdsvn.tun.st.com/Component_Documentation_Library/Trunk/Display/EVERLIGHT_19-213SYGC-S530-E2-5T, Full_Alternate_Internal_Part_Number=MCD-00320, ID=5016, Internal_Part_Number=MCD-02900, Order_Code_Digikey=1080-19-213SYGC/S530-E2/5TTR-ND, Order_Code_Farnell=N/A, Order_Code_RS=N/A, Part_Preference=Recommended, Part_Type=Display, Partial_Alternate_Internal_Part_Number=MCD-00050, ShowFields=YES, Status=Released
LD4: library part MCD-02787, "LED, Red, 1V7 to 2V2, 5mA, 0603", Manufacturer=EVERLIGHT, Manufacturer_Part_Number=19-217/R6C-AL1M2VY/6T, Package=0603, Component_Country_Of_Origin=China, ComponentLink1URL=http://tunmcdsvn.tun.st.com/Component_Documentation_Library/Trunk/Display/EVERLIGHT_19-217-R6C-AL1M2VY-6T, Full_Alternate_Internal_Part_Number=MCD-02401, ID=4899, Internal_Part_Number=MCD-02787, Order_Code_Digikey=1080-19-217/R6C-AL1M2VY/6TTR-ND, Order_Code_Farnell=N/A, Order_Code_RS=N/A, Part_Preference=Recommended, Part_Type=Display, Partial_Alternate_Internal_Part_Number=MCD-00586, ShowFields=YES, Status=Released
Q1 Q2: library part MCD-00073, "NPN Bipolar Transistor", Alternate_Manufacturer="ON SEMICONDUCTOR", Alternate_Manufacturer_Part_Number="MMBT2222LT1G / MMBT2222ALT1G / MMBT2222ALT3G", Manufacturer_Part_Number=BSR14, Package=SOT-23, Component_Country_Of_Origin=Unknown, ComponentLink1Description=Datasheet, ComponentLink1URL=http://tunmcdsvn.tun.st.com/Component_Documentation_Library/Trunk/IC/ON_SEMICONDUCTOR_BSR14, ECCN_EU=NEC, ECCN_US=EAR99, ID=2519, Internal_Part_Number=MCD-00073, Manufacturer="ON SEMICONDUCTOR", Order_Code_Digikey=N/A, Order_Code_Farnell=N/A, Order_Code_RS=N/A, Part_Preference=Recommended, Part_Type=Transistor, Partial_Alternate_Internal_Part_Number="MCD-01737, MCD-03305, MCD-02988", Provided_By=SUBCO, ShowFields=YES, Status=Released
R1 R30: library part MCD-00070, "Resistor,1K,0603,1%,1/10W", Manufacturer=YAGEO, Manufacturer_Part_Number=RC0603FR-071KL, Package=0603, Component_Country_Of_Origin=China, ComponentLink1Description=Yageo_Resistor_RC0603-series.pdf, ComponentLink1URL=http://tunmcdsvn.tun.st.com/Component_Documentation_Library/Trunk/Resistor/YAGEO_RC_L_Series, ECCN_EU=n/a, ECCN_US=n/a, ID=2522, Initial_Board_Reference=MB1274, Internal_Part_Number=MCD-00070, Order_Code_Digikey=311-1.00KHRCT-ND, Order_Code_Farnell=9238484RL, Order_Code_RS=9238484RL, Part_Preference=Recommended, Part_Type=Resistor, Provided_By=Subcon, ShowFields=YES, Status=Released
R2 R3: library part MCD-00490, "Resistor, 560R, 0603, +/-1%, 1/10W", Manufacturer=YAGEO, Manufacturer_Part_Number=RC0603FR-07560RL, Package=0603, BMS_Part_Number=9129742, Component_Country_Of_Origin=China, ComponentLink1URL=http://tunmcdsvn.tun.st.com/Component_Documentation_Library/Trunk/Resistor/YAGEO_RC_L_Series, ID=2787, Internal_Part_Number=MCD-00490, Order_Code_Digikey=311-560HRCT-ND, Order_Code_Farnell=9238450, Order_Code_RS=N/A, Part_Preference=Recommended, Part_Type=Resistor, ShowFields=YES, Status=Released
R4 R15 R20: library part MCD-00067, "Resistor, 100R, 0402, +/- 1%, 1/16W", Manufacturer=YAGEO, Manufacturer_Part_Number=RC0402FR-07100RL, Package=0402, Component_Country_Of_Origin=China, ComponentLink1URL=http://tunmcdsvn.tun.st.com/Component_Documentation_Library/Trunk/Resistor/YAGEO_RC_L_Series, ID=2527, Internal_Part_Number=MCD-00067, Order_Code_Digikey=311-100LRCT-ND, Order_Code_Farnell=9239111, Order_Code_RS=9239111, Part_Preference=Recommended, Part_Type=Resistor, ShowFields=YES, Status=Released
R5: library part MCD-00185, "Resistor,3K,0402,1%,1/16W", Manufacturer=YAGEO, Manufacturer_Part_Number=RC0402FR-073KL, Package=0402, Component_Country_Of_Origin=China, ComponentLink1Description=Yageo_Resistor_RC0402-series.pdf, ComponentLink1URL=http://tunmcdsvn.tun.st.com/Component_Documentation_Library/Trunk/Resistor/YAGEO_RC_L_Series, ECCN_EU=n/a, ECCN_US=n/a, ID=2682, Internal_Part_Number=MCD-00185, Order_Code_Digikey=311-3KLRCT-ND, Order_Code_Farnell=1458777, Order_Code_RS=N/A, Part_Preference=Recommended, Part_Type=Resistor, Provided_By=Subcon, ShowFields=YES, Status=Released
R6 R26 R28: library part MCD-00223, "Resistor,100K,0603,1%,1/10W", Manufacturer=YAGEO, Manufacturer_Part_Number=RC0603FR-07100KL, Package=0603, Component_Country_Of_Origin=China, ComponentLink1Description=Yageo_Resistor_RC0603-series.pdf, ComponentLink1URL=http://tunmcdsvn.tun.st.com/Component_Documentation_Library/Trunk/Resistor/YAGEO_RC_L_Series, ECCN_EU=n/a, ECCN_US=n/a, ID=2647, Initial_Board_Reference=MB1319, Internal_Part_Number=MCD-00223, Order_Code_Digikey=311-100KHRTR-ND, Order_Code_Farnell=2421851, Order_Code_RS=N/A, Part_Preference=Recommended, Part_Type=Resistor, Provided_By=Subcon, ShowFields=YES, Status=Released
R7 R25: library part MCD-00225, "Resistor,510R,0603,1%,1/10W", Manufacturer=YAGEO, Manufacturer_Part_Number=RC0603FR-07510RL, Package=0603, Component_Country_Of_Origin=China, ComponentLink1Description=Datasheet, ComponentLink1URL=http://tunmcdsvn.tun.st.com/Component_Documentation_Library/Trunk/Resistor/YAGEO_RC_L_Series, ECCN_EU=NEC, ECCN_US=EAR99, ID=2644, Internal_Part_Number=MCD-00225, Order_Code_Digikey=311-510HRCT-ND, Order_Code_Farnell=1799351, Order_Code_RS=N/A, Part_Preference=Recommended, Part_Type=Resistor, Provided_By=SUBCO, ShowFields=YES, Status=Released
R8 R31: library part MCD-00220, "Resistor,10K,0603,1%,1/10W", Manufacturer=YAGEO, Manufacturer_Part_Number=RC0603FR-0710KL, Package=0603, Component_Country_Of_Origin=China, ComponentLink1Description=Yageo_Resistor_RC0603-series.pdf, ComponentLink1URL=http://tunmcdsvn.tun.st.com/Component_Documentation_Library/Trunk/Resistor/YAGEO_RC_L_Series, ECCN_EU=n/a, ECCN_US=n/a, ID=2649, Initial_Board_Reference=MB1319, Internal_Part_Number=MCD-00220, Order_Code_Digikey=311-10.0KHRCT-ND, Order_Code_Farnell=9238603, Order_Code_RS=N/A, Part_Preference=Recommended, Part_Type=Resistor, Provided_By=Subcon, ShowFields=YES, Status=Released
R9 R10 R13 R18 R22 R23 R32: library part MCD-00481, "Resistor,47R,0402,1%,1/16W", Manufacturer=YAGEO, Manufacturer_Part_Number=RC0402FR-0747RL, Package=0402, Component_Country_Of_Origin=China, ComponentLink1Description=Datasheet, ComponentLink1URL=http://tunmcdsvn.tun.st.com/Component_Documentation_Library/Trunk/Resistor/YAGEO_RC_L_Series, ECCN_EU=NEC, ECCN_US=EAR99, ID=2796, Internal_Part_Number=MCD-00481, Order_Code_Digikey=311-47.0LRCT-ND, Order_Code_Farnell=9239073, Order_Code_RS=N/A, Part_Preference=Recommended, Part_Type=Resistor, Provided_By=SUBCO, ShowFields=YES, Status=Released
R11 R16 R19: library part MCD-00065, "Resistor,4K7,0402,1%,1/16W", Alternate_Manufacturer=YAGEO, Alternate_Manufacturer_Part_Number=RT0402FRE074K7L, Manufacturer_Part_Number=RC0402FR-074K7L, Package=0402, Component_Country_Of_Origin=China, ComponentLink1Description=Yageo_Resistor_RC0402-series.pdf, ComponentLink1URL=http://tunmcdsvn.tun.st.com/Component_Documentation_Library/Trunk/Resistor/YAGEO_RC_L_Series, ECCN_EU=n/a, ECCN_US=n/a, ID=2526, Initial_Board_Reference=MB1274, Internal_Part_Number=MCD-00065, Manufacturer=YAGEO, Order_Code_Digikey=311-4.7KLRCT-ND, Order_Code_Farnell=9239316, Order_Code_RS=9239316, Part_Preference=Recommended, Part_Type=Resistor, Partial_Alternate_Internal_Part_Number=MCD-03300, Provided_By=Subcon, ShowFields=YES, Status=Released
R12: library part MCD-00055, "Resistor,2K7,0402,1%,1/16W", Manufacturer=YAGEO, Manufacturer_Part_Number=RC0402FR-072K7L, Package=0402, Component_Country_Of_Origin=China, ComponentLink1Description=Yageo_Resistor_RC0402-series.pdf, ComponentLink1URL=http://tunmcdsvn.tun.st.com/Component_Documentation_Library/Trunk/Resistor/YAGEO_RC_L_Series, ECCN_EU=n/a, ECCN_US=n/a, ID=2535, Initial_Board_Reference=MB1274, Internal_Part_Number=MCD-00055, Order_Code_Digikey=311-2.70KLRCT-ND, Order_Code_Farnell=9239286, Order_Code_RS=9239286, Part_Preference=Recommended, Part_Type=Resistor, Provided_By=Subcon, ShowFields=YES, Status=Released
R14 R17 R21 R24: library part MCD-00053, "Resistor,10K,0402,1%,1/16W", Manufacturer=YAGEO, Manufacturer_Part_Number=RC0402FR-0710KL, Package=0402, BMS_Part_Number=9131590, Component_Country_Of_Origin=China, ComponentLink1Description=Yageo_Resistor_RC0402-series.pdf, ComponentLink1URL=http://tunmcdsvn.tun.st.com/Component_Documentation_Library/Trunk/Resistor/YAGEO_RC_L_Series, ECCN_EU=n/a, ECCN_US=n/a, ID=2539, Initial_Board_Reference=MB1274, Internal_Part_Number=MCD-00053, Order_Code_Digikey=311-10.0KLRCT-ND, Order_Code_Farnell=9239359, Order_Code_RS=9239359, Part_Preference=Recommended, Part_Type=Resistor, Provided_By=subcon, ShowFields=YES, Status=Released
R27: library part MCD-00197, "Resistor,330R,0603,1%,1/10W", Manufacturer=YAGEO, Manufacturer_Part_Number=RC0603FR-07330RL, Package=0603, BMS_Part_Number=9129729, Component_Country_Of_Origin=China, ComponentLink1Description=Yageo_Resistor_RC0603-series.pdf, ComponentLink1URL=http://tunmcdsvn.tun.st.com/Component_Documentation_Library/Trunk/Resistor/YAGEO_RC_L_Series, ECCN_EU=n/a, ECCN_US=n/a, ID=2672, Internal_Part_Number=MCD-00197, Order_Code_Digikey=311-330HRCT-ND, Order_Code_Farnell=9238425, Order_Code_RS=N/A, Part_Preference=Recommended, Part_Type=Resistor, Provided_By=Subcon, ShowFields=YES, Status=Released
R29: library part MCD-00222, "Resistor,47K,0603,1%,1/10W", Manufacturer=YAGEO, Manufacturer_Part_Number=RC0603FR-0747KL, Package=0603, Component_Country_Of_Origin=China, ComponentLink1Description=Datasheet, ComponentLink1URL=http://tunmcdsvn.tun.st.com/Component_Documentation_Library/Trunk/Resistor/YAGEO_RC_L_Series, ECCN_EU=NEC, ECCN_US=EAR99, ID=2645, Internal_Part_Number=MCD-00222, Order_Code_Digikey=311-47.0KHRCT-ND, Order_Code_Farnell=9238689, Order_Code_RS=N/A, Part_Preference=Recommended, Part_Type=Resistor, Provided_By=SUBCO, ShowFields=YES, Status=Released
R33: library part MCD-01215, "resistor, 10K, 0603, 0.5%, 1/10W", Manufacturer=YAGEO, Manufacturer_Part_Number=RC0603DR-0710KL, Package=0603, Component_Country_Of_Origin=China, ComponentLink1Description=Datasheet, ComponentLink1URL=http://tunmcdsvn.tun.st.com/Component_Documentation_Library/Trunk/Resistor/YAGEO_RC_L_Series, ECCN_EU=NEC, ECCN_US=EAR99, ID=3280, Internal_Part_Number=MCD-01215, Order_Code_Digikey=RC0603DR-0710KL-ND, Order_Code_Farnell=N/A, Order_Code_RS=N/A, Part_Preference=Recommended, Part_Type=Resistor, Provided_By=SUBCO, ShowFields=YES, Status=Checked
R34: library part MCD-01209, "Resistor,33K,0603,0.5%,1/10W", Manufacturer=YAGEO, Manufacturer_Part_Number=RC0603DR-0733KL, Package=0603, Component_Country_Of_Origin=China, ComponentLink1Description=Datasheet, ComponentLink1URL=http://tunmcdsvn.tun.st.com/Component_Documentation_Library/Trunk/Resistor/YAGEO_RC_L_Series, ECCN_EU=NEC, ECCN_US=EAR99, ID=3286, Internal_Part_Number=MCD-01209, Order_Code_Digikey=RC0603DR-0733KL-ND, Order_Code_Farnell=N/A, Order_Code_RS=N/A, Part_Preference=Recommended, Part_Type=Resistor, Provided_By=SUBCO, ShowFields=YES, Status=Checked
R35: library part MCD-00342, "Resistor,180R,0603,1%,1/10W", Manufacturer=YAGEO, Manufacturer_Part_Number=RC0603FR-07180RL, Package=0603, Component_Country_Of_Origin=China, ComponentLink1Description=Datasheet, ComponentLink1URL=http://tunmcdsvn.tun.st.com/Component_Documentation_Library/Trunk/Resistor/YAGEO_RC_L_Series, ECCN_EU=NEC, ECCN_US=EAR99, ID=2936, Internal_Part_Number=MCD-00342, Order_Code_Digikey=311-180HRCT-ND, Order_Code_Farnell=9238395, Order_Code_RS=N/A, Part_Preference=Recommended, Part_Type=Resistor, Provided_By=SUBCO, ShowFields=YES, Status=Released
SB1 SB2 SB3 SB4 SB5 SB6 SB7 SB8 SB9 SB10 SB11 SB12 SB13 SB14 SB15 SB16 SB17 SB18 SB19 SB20 SB21 SB22 SB23 SB24 SB25 SB26 SB27 SB28 SB29 SB30 SB31 SB32 SB33 SB34 SB35 SB36 SB37 SB38 SB39 SB40 SB41: library part MCD-00071, "Solder Bridge ON", Manufacturer=YAGEO, Manufacturer_HQ_COO=Unknown, Manufacturer_Part_Number=RC0603JR-070RL, Package=0603, Component_Country_Of_Origin=China, ComponentLink1Description=Datasheet, ComponentLink1URL=http://tunmcdsvn.tun.st.com/Component_Documentation_Library/Trunk/Resistor/YAGEO_RC_Series, ECCN_EU=n/a, ECCN_US=n/a, ID=2521, Internal_Part_Number=MCD-00071, Order_Code_Digikey=311-0.0GRTR-ND, Order_Code_Farnell=2421846, Order_Code_RS=199-5647, Part_Preference=Recommended, Part_Type=Resistor, Provided_By=SUBCO, ShowFields=YES, Status=Released
U1 U6: library part MCD-00136, "Dual Transil array for ESD protection", Manufacturer=STMICROELECTRONICS, Manufacturer_HQ_COO=EU, Manufacturer_Part_Number=ESDALC6V1W5, Package=SOT323-5, BMS_Part_Number=9151112, Component_Country_Of_Origin=China, ComponentLink1Description=STM_ESD_ESDALC6V1W5.pdf, ComponentLink1URL=http://tunmcdsvn.tun.st.com/Component_Documentation_Library/Trunk/Diode/STMICROELECTRONICS_ESDALC6V1W5, ECCN_EU=NEC, ECCN_US=EAR99, ID=2731, Initial_Board_Reference=MB1262, Internal_Part_Number=MCD-00136, Order_Code_Digikey=497-7231-2-ND, Order_Code_Farnell=2252381, Order_Code_RS=178-7373, Part_Preference=Recommended, Part_Type=Diode, Provided_By=Subcon, ShowFields=YES, Status=Released
U2: library part MCD-00649, "Common mode filter with ESD protection for USB 2.0 interface", Manufacturer=STMICROELECTRONICS, Manufacturer_HQ_COO=EU, Manufacturer_Part_Number=ECMF02-2AMX6, Package=QFN-6, BMS_Part_Number=9151138, Component_Country_Of_Origin=China, ComponentLink1Description=STM_ESD_ECMF02-2AMX6.pdf, ComponentLink1URL=http://tunmcdsvn.tun.st.com/Component_Documentation_Library/Trunk/Diode/STMICROELECTRONICS_ECMF02-2AMX6, ECCN_EU=NEC, ECCN_US=EAR99, ID=3094, Initial_Board_Reference=MB1248, Internal_Part_Number=MCD-00649, Order_Code_Digikey=497-10773-2-ND, Order_Code_Farnell=2629720, Order_Code_RS=880-5276, Part_Preference=Recommended, Part_Type=Diode, Provided_By=Subcon, ShowFields=YES, Status=Released
U3: library part MCD-00251, "High power transient voltage suppressor, 7V breakdown", Manufacturer=STMICROELECTRONICS, Manufacturer_HQ_COO=EU, Manufacturer_Part_Number=ESDA7P60-1U1M, Package=QFN1610, BMS_Part_Number=9179042, Component_Country_Of_Origin=China, ComponentLink1Description=STM_ESD_ESDA7P60-1U1M.pdf, ComponentLink1URL=http://tunmcdsvn.tun.st.com/Component_Documentation_Library/Trunk/Diode/STMICROELECTRONICS_ESDA7P60-1U1M, ECCN_EU=NEC, ECCN_US=EAR99, ID=2618, Initial_Board_Reference=MB1311, Internal_Part_Number=MCD-00251, Order_Code_Digikey=497-16253-2-ND, Order_Code_Farnell=N/A, Order_Code_RS=110-6381, Part_Preference=Recommended, Part_Type=Diode, Provided_By=Subcon, ShowFields=YES, Status=Released
U4: library part MCD-00159, "500mA, Enhanced single channel power switches with active high enable pin", Alternate_Manufacturer="TEXAS INSTRUMENTS", Alternate_Manufacturer_Part_Number=TPS2051C, Manufacturer=STMICROELECTRONICS, Manufacturer_Part_Number=STMPS2151STR, Package=SOT23-5, BMS_Part_Number=9159009, Component_Country_Of_Origin=Malaysia, ComponentLink1Description=STM_PWR-Switch_STMPS2151STR.pdf, ComponentLink1URL=http://tunmcdsvn.tun.st.com/Component_Documentation_Library/Trunk/IC/STMICROELECTRONICS_STMPS2151STR, ECCN_EU=NEC, ECCN_US=EAR99, ID=2708, Initial_Board_Reference=MB1264, Internal_Part_Number=MCD-00159, Order_Code_Digikey=497-6934-2-ND, Order_Code_Farnell=1842616, Order_Code_RS=165-5516, Part_Preference=Recommended, Part_Type=IC, Provided_By=Subcon, ShowFields=YES, Status=Released
U5: library part MCD-00596, "STM32F723IEK  (STM32F7) BGA176", Manufacturer=STMICROELECTRONICS, Manufacturer_HQ_COO=EU, Manufacturer_Part_Number=STM32F723IEK6, Package=UFBGA201, BMS_Part_Number=9175300, Component_Country_Of_Origin=Philippines, ComponentLink1Description=Datasheet, ComponentLink1URL=http://tunmcdsvn.tun.st.com/Component_Documentation_Library/Trunk/IC/STMICROELECTRONICS_STM32F723IEK6, ECCN_EU=NEC, ECCN_US=3A991A2, ID=3144, Internal_Part_Number=MCD-00596, Order_Code_Digikey=497-17186-ND, Order_Code_Farnell=2725149, Order_Code_RS=135-8241, Part_Preference="Not recommended", Part_Type=IC, Provided_By="SUBCO with ST control", ShowFields=YES, Status=Released
U7: library part MCD-00086, "Ultra low drop-low noise BiCMOS voltage, regulators low ESR capacitors compatible", Manufacturer=STMICROELECTRONICS, Manufacturer_HQ_COO=EU, Manufacturer_Part_Number=LD3985M33R, Package=SOT23-5, BMS_Part_Number=9176161, Component_Country_Of_Origin=China, ComponentLink1Description=STM_LDO_LD3985.pdf, ComponentLink1URL=http://tunmcdsvn.tun.st.com/Component_Documentation_Library/Trunk/IC/STMICROELECTRONICS_LD3985M33R, ECCN_EU=NEC, ECCN_US=EAR99, ID=2506, Initial_Board_Reference=MB1274, Internal_Part_Number=MCD-00086, Order_Code_Digikey=497-3504-2-ND, Order_Code_Farnell=1250121, Order_Code_RS=168-6500, Part_Preference=Recommended, Part_Type=IC, Provided_By=Subcon, ShowFields=YES, Status=Released
U8 U9 U10: library part MCD-03501, "Diode, ESD TVS, 5V5, 100nA, 10V, 0201", Manufacturer=STMICROELECTRONICS, Manufacturer_Part_Number=ESDZL5-1F4, Package=0201, Component_Country_Of_Origin=Singapore, ComponentLink1URL=http://tunmcdsvn.tun.st.com/Component_Documentation_Library/Trunk/Diode/STMICROELECTRONICS_ESDZL5-1F4, ID=5617, Internal_Part_Number=MCD-03501, Order_Code_Digikey=497-17544-2-ND, Order_Code_Farnell=ESDZL5-1F4, Order_Code_RS=ESDZL5-1F4, Part_Preference=Recommended, Part_Type=Diode, ShowFields=YES, Status=Released
U11: library part MCD-00088, "IC REG LDO 5V 0.8A SOT223", Manufacturer=STMICROELECTRONICS, Manufacturer_HQ_COO=EU, Manufacturer_Part_Number=LD1117S50TR, Package=SOT223-4, BMS_Part_Number=9176133, Component_Country_Of_Origin=China, ComponentLink1Description=Datasheet, ComponentLink1URL=http://tunmcdsvn.tun.st.com/Component_Documentation_Library/Trunk/IC/STMICROELECTRONICS_LD1117S50TR, ECCN_EU=NEC, ECCN_US=EAR99, ID=2503, Internal_Part_Number=MCD-00088, Order_Code_Digikey=497-6447-2-ND, Order_Code_Farnell=1467781, Order_Code_RS=165-7748, Part_Preference=Recommended, Part_Type=IC, Provided_By="SUBCO with ST control", ShowFields=YES, Status=Released
U12: library part MCD-00215, "Low quiescent current and low noise voltage regulators", Manufacturer=STMICROELECTRONICS, Manufacturer_Part_Number=LD39050PU33R, Package=DFN-6, BMS_Part_Number=9176126, Component_Country_Of_Origin=Malaysia, ComponentLink1Description=Datasheet, ComponentLink1URL=http://tunmcdsvn.tun.st.com/Component_Documentation_Library/Trunk/IC/STMICROELECTRONICS_LD39050PU33R, ECCN_EU=NEC, ECCN_US=EAR99, ID=2654, Internal_Part_Number=MCD-00215, Order_Code_Digikey=497-8716-2-ND, Order_Code_Farnell=2762703, Order_Code_RS=196-1948, Part_Preference=Recommended, Part_Type=IC, Provided_By="SUBCO with ST control", ShowFields=YES, Status=Released
U13: library part MCD-01243, "STM32G474, LQFP64 package,  3D IC footprint with 2D socket footprint.", Manufacturer=STMICROELECTRONICS, Manufacturer_HQ_COO=EU, Manufacturer_Part_Number=STM32G474RET6, Package=LQFP64, BMS_Part_Number=9175326, Component_Country_Of_Origin=China, ComponentLink1Description=Datasheet, ComponentLink1URL=http://tunmcdsvn.tun.st.com/Component_Documentation_Library/Trunk/IC/STMICROELECTRONICS_STM32G474RET6, ECCN_EU=NEC, ECCN_US=3A991A2, ID=3257, Internal_Part_Number=MCD-01243, Order_Code_Digikey=497-STM32G474RET6-ND, Order_Code_Farnell=3132418, Order_Code_RS=193-9861, Part_Preference=Recommended, Part_Type=IC, Provided_By="SUBCO with ST control", ShowFields=YES, Status=Released
U14: library part MCD-01802, "Programmable voltage reference with 0.4% voltage precision", Manufacturer=STMICROELECTRONICS, Manufacturer_HQ_COO=EU, Manufacturer_Part_Number=TL1431CL5T, Package=SOT23-5, BMS_Part_Number=9176334, Component_Country_Of_Origin=Malaysia, ComponentLink1Description=Datasheet, ComponentLink1URL=http://tunmcdsvn.tun.st.com/Component_Documentation_Library/Trunk/IC/STMICROELECTRONICS_TL1431CL5T, ECCN_EU=NEC, ECCN_US=EAR99, ID=3902, Internal_Part_Number=MCD-01802, Order_Code_Digikey=497-16126-2-ND, Order_Code_Farnell=N/A, Order_Code_RS=N/A, Part_Preference=Recommended, Part_Type=IC, Provided_By="SUBCO with ST control", ShowFields=YES, Status=Released
X1: library part MCD-00597, "Oscillator 25.00Mhz, -+50PPM, 3.3V, Temp -55 to +125°C", Alternate_Manufacturer="AVX CORP/KYOCERA CORP", Alternate_Manufacturer_Part_Number=KC2520B25.0000C10E00, Manufacturer=NDK, Manufacturer_Part_Number=NZ2520SH-25MHz-END4869C, Package=2.5x2.0mm, BMS_Part_Number=9157050, Component_Country_Of_Origin=Japan, ComponentLink1Description=NDK_OSCILLATOR_NZ2520SB.pdf, ComponentLink1URL=http://tunmcdsvn.tun.st.com/Component_Documentation_Library/Trunk/Crystal_Oscillator/NDK_NZ2520SH_Series, ECCN_EU=n/a, ECCN_US=n/a, ID=3148, Initial_Board_Reference=MB1331, Internal_Part_Number=MCD-00597, Order_Code_Digikey=N/A, Order_Code_Farnell=N/A, Order_Code_RS=N/A, Part_Preference=Recommended, Part_Type=Crystal_Osc, Provided_By=STM, ShowFields=YES, Status=Released
X2: library part MCD-00091, "Crystal 32.768kHz, 6pF, +-20ppm, 50Kohms max, SMD", Manufacturer=NDK, Manufacturer_Part_Number=NX3215SA-32.768KHz-EXS00A-MU00525, Package=3.2x1.5mm, BMS_Part_Number=9157034, Component_Country_Of_Origin=Japan, ComponentLink1Description=Datasheet, ComponentLink1URL=http://tunmcdsvn.tun.st.com/Component_Documentation_Library/Trunk/Crystal_Oscillator/NDK_NX3215SA_Series, ECCN_EU=NEC, ECCN_US=EAR99, ID=2553, Internal_Part_Number=MCD-00091, Order_Code_Digikey=644-1386, Order_Code_Farnell=N/A, Order_Code_RS=N/A, Part_Preference=Recommended, Part_Type=Crystal_Osc, Provided_By=SUBCO, ShowFields=YES, Status=Released
X3: library part MCD-01036, "Crystal 24MHz, 6pF, +-20ppm, 80ohms max, SMD", Manufacturer=NDK, Manufacturer_Part_Number=NX2016SA-24MHz-EXS00A-CS10820, Package=2.0x1.6mm, BMS_Part_Number=9157045, Component_Country_Of_Origin=Japan, ComponentLink1Description=Datasheet, ComponentLink1URL=http://tunmcdsvn.tun.st.com/Component_Documentation_Library/Trunk/Crystal_Oscillator/NDK_NX2016SA_Series, ECCN_EU=NEC, ECCN_US=EAR99, ID=2989, Internal_Part_Number=MCD-01036, Order_Code_Digikey=644-1365, Order_Code_Farnell=N/A, Order_Code_RS=N/A, Part_Preference=Recommended, Part_Type=Crystal_Osc, Provided_By=SUBCO, ShowFields=YES, Status=Released

## Free pads (board coordinates)
  round 3.2 hole 3.2 unplated: 0(10.87,54.57) 0(43.89,2.5) 0(59.13,53.3)

## Via types
v1: diameter 0.45, hole 0.2, Top Layer to Bottom Layer, tented both sides, 920 vias

## Nets (pads, with @x,y where several pads share a name; then routed paths per layer and width w, separated by ;. In a path a pad name is that pad's centre, name@x,y a point inside that pad or via, vN(x,y) a via of type N, cw(c..) or ccw(c..) an arc to the next point about the centre after c; other vN are vias at no path point)
3V3: CN4.3 CN6.4 CN7.16 JP6.1 R19.2 R25.1 SB5.2 SB39.1 | length 88.7
  Top Layer w0.3: v1(6.35,68.495) v1@6.36,68.505 ; v1(35.425,56.325) 35.425,56.6 35.7,56.875 v1(36.375,56.875) 36.375,56.195 R25.1@36.345,56.165 35.585,56.165 v1(35.425,56.325) ; 36.675,62.65 36.85,62.475 v1(37.3,62.475) v1(37.3,63.4) R19.2@36.675,63.4 36.675,62.65
  Top Layer w0.5: v1(5.15,68.5) v1(5.75,68.5) 5.755,68.495 v1(6.35,68.495) ; v1@6.36,68.505 CN4.3@8.363,68.505
  Top Layer w1.5: CN7.16@5.79,32.98 CN6.4@10.87,32.98
  Signal Layer 2 w0.5: v1(5.15,68.5) v1(5.75,68.5) 6.345,68.5 v1(6.35,68.495) 9.105,68.495 10.175,67.425 13.475,67.425 24.575,56.325 v1(35.425,56.325) 35.825,56.325 v1(36.375,56.875) 37.3,57.8 v1(37.3,62.475) v1(37.3,63.4)
  Signal Layer 2 w1.5: CN7.16@5.79,32.98 CN6.4@10.87,32.98
  Bottom Layer w0.3: 4.4,32.15 4.96,32.15 CN7.16@5.79,32.98 ; 9.65,32.15 10.04,32.15 CN6.4@10.87,32.98 ; 34.9,42.45 34.9,41.97 JP6.1@35.635,41.235 34.925,40.525 34.925,39.625
  Bottom Layer w0.5: v1(5.15,68.5) v1(5.75,68.5) 5.753,68.498 6.347,68.498 v1(6.35,68.495) ; 11.65,36.875 12.425,36.875 12.45,36.85 ; v1(35.425,56.325) 35.825,56.325 v1(36.375,56.875) ; JP6.1@35.635,41.235 37.965,41.235 SB5.2@37.97,41.24 ; v1(37.3,62.475) v1(37.3,63.4)
  Bottom Layer w0.6: 11.875,33.875 12.3,34.3 12.3,35.425 12.45,35.575
  Bottom Layer w0.8: CN7.16@5.79,32.98 CN6.4@10.87,32.98 10.98,32.98 11.875,33.875 ; 12.45,35.575 12.45,36.85 14.3,36.85 14.875,36.85 SB39.1@15.325,37.3
3V3_STLK: C6.2 C7.2 C8.2 C9.2 C13.2 C14.2 C15.2 C16.2 C17.2 C18.2 C21.2 C22.2 C23.2 C24.2 C25.2 C26.2 C27.2 C28.2 C29.2 C31.2 C32.2 C33.2 CN2.1 LD1.4 R14.1 R24.1 U5.C1 U5.C5 U5.C7 U5.C8 U5.C9 U5.F3 U5.G3 U5.G13 U5.H13 U5.J12 U5.J13 U5.K4 U5.N8 U5.N9 U5.N10 U5.P1 U5.R1 U7.5 X1.4 | length 200.2
  Top Layer w0.15: 24.55,68.325 24.805,68.07 26.12,68.07 U5.C8@26.45,68.4 ; 24.65,65.95 24.825,66.125 26.125,66.125 U5.C5@26.45,66.45 ; 24.65,68.95 24.875,68.725 26.125,68.725 U5.C9@26.45,69.05 ; 24.725,67.35 24.805,67.43 26.13,67.43 U5.C7@26.45,67.75 ; 27.275,63.35 27.43,63.505 27.43,64.633 27.617,64.82 28.07,64.82 U5.F3@28.4,65.15 ; U5.G3@29.05,65.15 29.37,64.83 29.845,64.83 30.025,64.65 30.025,63.575 30.2,63.4 ; U5.J12@30.35,71 30.67,71.32 31.773,71.32 31.98,71.527 31.98,73.23 32.175,73.425 ; U5.K4@31,65.8 30.68,65.48 30.68,64.367 30.877,64.17 31.783,64.17 31.975,63.978 31.975,63.4 ; U5.N8@32.95,68.4 33.27,68.08 34.745,68.08 ; U5.N9@32.95,69.05 33.275,68.725 34.75,68.725 ; U5.N10@32.95,69.7 33.275,69.375 34.725,69.375
  Top Layer w0.16: 26.775,73.2 26.775,73.085 26.775,72.775 26.925,72.625 28.5,72.625 ; 28.535,72.625 28.625,72.625 28.725,72.525 28.725,72.165 28.725,71.975 U5.G13@29.05,71.65 ; 29.1,73.375 29.375,73.1 29.375,71.975 U5.H13@29.7,71.65 ; 29.825,73.5 30.025,73.3 30.025,71.975 U5.J13@30.35,71.65